# EAGLE board single_unit_v_0_1 (EAGLE 5.06)
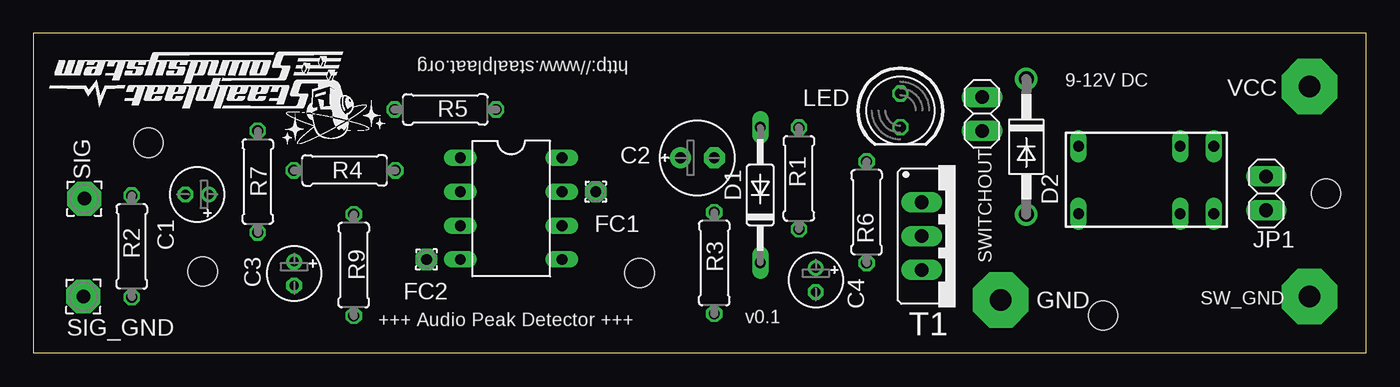
[diagram p0: board, top side]
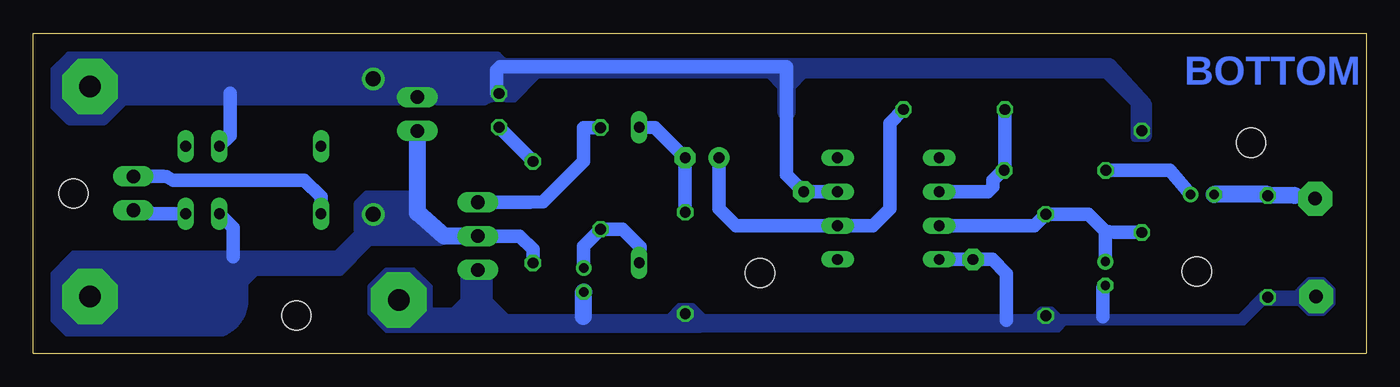
[diagram p1: board, bottom side, seen from below]

Size 100 x 24 mm. Coordinates in mm from the lower left corner, seen from the top.
Outline: 100,0 100,24 0,24 0,0 100,0
Copper layers (1*16): top 0.035mm / dielectric 1.5mm / bottom 0.035mm
Design rules "pcb-pool": minimum track width 6mil, minimum drill 12mil, track to track 6mil, track to pad 6mil, pad to pad 6mil, via to via 6mil, smd to smd 8mil, copper to edge 40mil, drill to drill 20mil, minimum pad ring 8mil, minimum via ring 8mil, stop-mask expansion 6mil, vias tented up to drill 0mil, thermal gap 10mil
Holes 2.2 mm at 45.48,6.02 12.7,6.15 8.64,15.8 96.98,12 80.27,2.84

## Footprints (pad centres in the part's own frame; a part is rotated, then mirrored left to right if it is on the bottom)
E1,8-4 = drill 0.711 pad 1.168 round: + -0.889,0 | drill 0.711 pad 1.168 octagon: - 0.889,0
E2,5-6E = drill 0.813 pad 1.575 round: + -1.27,0 | drill 0.813 pad 1.575 octagon: - 1.27,0
DO35-10 = drill 0.813 long: A 5.08,0; C -5.08,0
DO41-10 = drill 1.118 round: A 5.08,0; C -5.08,0
1,6/0,8 = drill 0.813 pad 1.6 octagon: 1 0,0
4,16O1,6 = drill 1.6 pad 4.166 octagon: 1 0,0
DIL08 = drill 0.813 long: 1 -3.81,-3.81; 2 -1.27,-3.81; 3 1.27,-3.81; 4 3.81,-3.81; 5 3.81,3.81; 6 1.27,3.81; 7 -1.27,3.81; 8 -3.81,3.81
1X02 = drill 1.016 long: 1 -1.27,0; 2 1.27,0
G5V1 = drill 0.813 long: 1 -5.08,-2.54; 2 -2.54,-2.54; 5 5.08,-2.54; 6 5.08,2.54; 9 -2.54,2.54; 10 -5.08,2.54
LED5MM = drill 0.813 octagon: A -1.27,0; K 1.27,0
0207/7 = drill 0.813 octagon: 1 -3.81,0; 2 3.81,0
2,54/1,0 = drill 1.016 pad 2.54 octagon: 1 0,0
TO220S = drill 1.016 long: 1 -2.54,-2.54; 2 0,-2.54; 3 2.54,-2.54

## Placement (x,y rotation side)
C1  10u  [E1,8-4]  12.3,11.92 180 top
C2  100u  [E2,5-6E]  49.82,14.66 0 top
C3  10u  [E1,8-4]  19.57,5.98 270 top
C4  10u  [E1,8-4]  58.71,5.5 270 top
D1  1N4148DO35-10  [DO35-10]  54.54,11.88 90 top
D2  1N4004  [DO41-10]  74.5,15.5 270 top
FC1  +  [1,6/0,8]  42.2,12.12 0 top
FC2  -  [1,6/0,8]  29.5,7.04 0 top
GND  GROUND  [4,16O1,6]  72.58,4 0 top
IC1  TL071P  [DIL08]  35.85,10.85 270 top
JP1  [1X02]  92.5,12 90 top
K1  G5V1  [G5V1]  83.5,13 180 top
LED  GREEN  [LED5MM]  65.05,18.22 270 top
R1  1k  [0207/7]  57.44,13.12 270 top
R2  10k  [0207/7]  7.39,8.02 90 top
R3  10k  [0207/7]  51.09,6.77 90 top
R4  1k  [0207/7]  23.35,13.72 0 top
R5  100k  [0207/7]  30.91,18.29 0 top
R6  1k  [0207/7]  62.52,10.58 90 top
R7  10k  [0207/7]  16.84,12.88 270 top
R9  10k  [0207/7]  24.04,6.62 90 top
SIG  SIGNAL  [2,54/1,0]  3.83,11.6 0 top
SIG_GND  V-  [2,54/1,0]  3.75,4.27 0 top
SW_GND  sw_ground  [4,16O1,6]  95.75,4.25 0 top
SWITCHOUT  SWITCHED_12VDC  [1X02]  71.18,17.95 270 top
T1  TIP122  [TO220S]  69.18,8.79 270 top
VCC  VCC+  [4,16O1,6]  95.75,20 0 top

## Library data of the parts
C1-C4 R9 = resistor
D1 D2 = diode
FC1 FC2 GND SIG SIG_GND SW_GND VCC = wirepad
IC1 = linear
JP1 SWITCHOUT = pinhead
K1 = relay
LED = led
R1-R7 = rcl
T1 = v-reg

## Nets
IN+: C1.- R2.2 SIG.1
N$1: LED.K R6.2
N$2: C1.+ R4.1
N$3: IC1.2 R4.2 R5.1
N$4: C4.+ D1.C R1.2
N$5: C3.+ IC1.3 R7.2 R9.2
N$6: C2.+ IC1.6 R5.2
N$7: C2.- D1.A R3.2
N$8: R1.1 T1.1
N$9: JP1.2 K1.6
RELAY_OUT: JP1.1 K1.10
SWITCHED_GND: D2.A K1.9 R6.1 SW_GND.1 SWITCHOUT.2 T1.2
V+: D2.C FC1.1 IC1.7 K1.2 LED.A R7.1 SWITCHOUT.1 VCC.1
V-: C3.- C4.- FC2.1 GND.1 IC1.4 R2.1 R3.1 R9.1 SIG_GND.1 T1.3

## Tracks (layer width: path | path; a pad name or v marks a point on that pad's centre or on a via)
IN+
  bottom 0.406: R2.2 7.39,11.92
  bottom 1.016: SIG.1 5.37,11.85
  bottom 1.27: 5.37,11.85 R2.2 | 7.39,11.92 C1.-
N$1
  bottom 1.016: R6.2 LED.K
N$2
  bottom 1.016: C1.+ 14.73,13.72 R4.1
N$3
  bottom 1.016: IC1.2 28.37,12.12 28,12.49 28,12.75 28,13 27.25,13.75 | R5.1 27.1,13.9 27.25,13.75 | R4.2 27.22,13.72 27.25,13.75
N$4
  bottom 1.016: D1.C 54.5,8 55.81,9.31 57.06,9.31 R1.2 58.71,8.04 C4.+
N$5
  bottom 1.016: IC1.3 24.89,9.58 R9.2 20.84,10.43 19.57,9.16 | 19.57,7.1 C3.+ 19.57,9.16 | R7.2 18.9,9.07 19.57,9.16
N$6
  bottom 1.016: C2.+ 48.55,10.85 47.28,9.58 IC1.6 37.02,9.58 35.75,10.85 35.75,12.25 35.75,17.26 R5.2
N$7
  bottom 1.016: D1.A 53.36,16.93 C2.- R3.2
N$8
  bottom 1.016: R1.1 58.71,16.93 58.71,14.39 61.75,11.35 62.75,11.33 T1.1
N$9
  bottom 1.016: JP1.2 90.27,13.27 90,13.25 89.5,13 87.75,13 79.69,13 78.42,11.73 K1.6
RELAY_OUT
  bottom 1.016: K1.10 90.48,10.46 91.21,10.46 91.75,11 JP1.1
SWITCHED_GND
  bottom 1.016: R6.1 62.52,7.79 63.52,8.79 T1.2 | K1.9 85,9.42 85,7.25
  bottom 1.27: T1.2 69.18,8.79 71.18,10.54 SWITCHOUT.2
  pour bottom (isolate 1.27, no thermals): 87.13,1.25 97.25,1.25 98.75,2.75 98.75,5.75 97,7.5 77.25,7.5 75.75,9 75.75,11.25 75,12 70.75,12 70.75,10.75 68.5,8.5 69.5,8.25 74.76,8.25 77,6.02 83.31,6.02 84.07,5.26 84.07,3.81 arc90
V+
  bottom 1.016: FC1.1 IC1.7 42.23,12.12 43.5,13.39 43.5,21.5 65,21.5 65.25,21.25 65.25,19.5 65,19.5 | K1.2 85.25,16.33 85.25,19.5
  pour bottom (isolate 1.27, no thermals): 19.25,21.75 16.5,18.75 16.5,16.24 17.25,16.24 17.25,18.75 19.5,21 42.25,21 43.25,20 43.25,18 43.75,18 43.75,20 44.75,21 62.25,21 64.25,19 93.25,19 94.75,17.5 97.25,17.5 98.5,18.75 98.5,21 97.25,22.25 65.25,22.25 64.75,21.75
V-
  bottom 1.016: IC1.4 FC2.1 28.06,7.04 27,5.98 27,2.49 | C3.- 19.75,4.91 19.75,2.75
  bottom 1.27: C4.- 58.75,4.57 58.75,2.75
  pour bottom (isolate 1.27, no thermals): 73.5,6.25 74.75,5 74.75,3 73.5,1.75 50,1.75 49.75,2.76 50.54,3.56 51.55,3.56 52.32,2.79 64.5,2.75 65.75,4 65.75,6.75 67.75,6.75 67.75,4 68.5,3.25 70.25,3.25 70.25,5 71.5,6.25
  pour bottom (isolate 1.27, no thermals): 50.51,1.75 23.11,1.78 22.6,2.29 9.25,2.26 7.74,3.77 5,3.77 4.25,3.02 3.25,3.02 2.5,3.77 2.5,4.77 3.25,5.52 4.25,5.52 5,4.77 5.23,4.51 7,4.5 7.75,4.5 9.5,2.75 23.11,2.79 23.61,3.3 24.38,3.3 24.88,2.79 50.51,2.75

## Text on the board
bottom: BOTTOM
tplace: http://www.staalplaat.org | 9-12V DC | +++ Audio Peak Detector +++ | v0.1